# EAGLE board blinky_board (EAGLE 7.7.0)
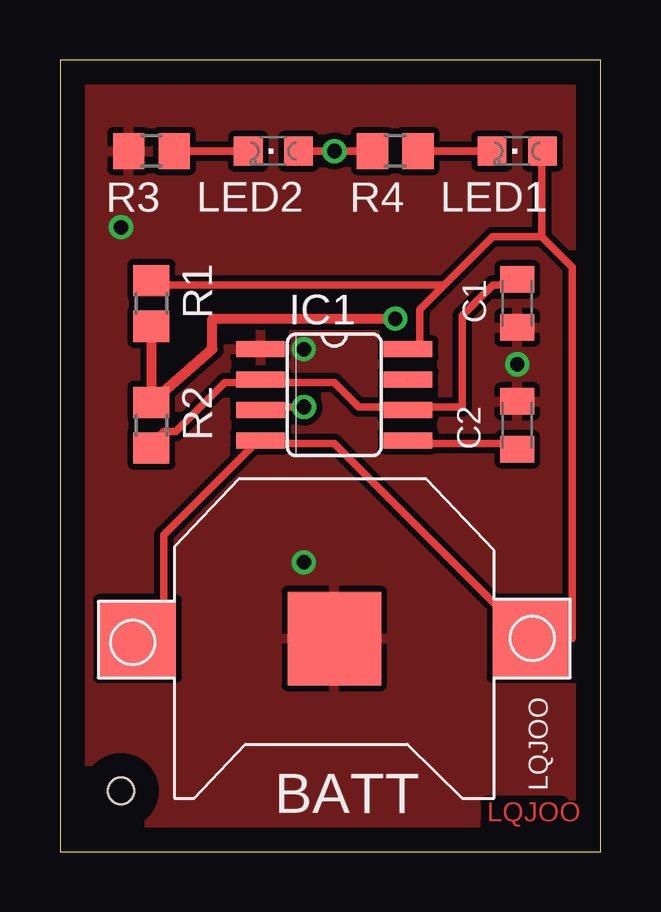
[diagram p0: board, top side]
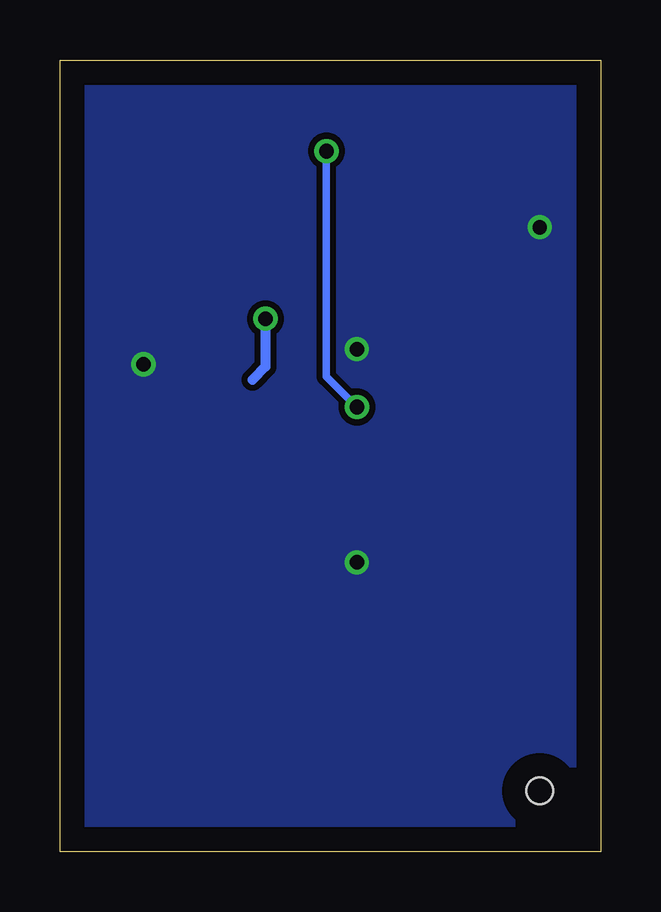
[diagram p1: board, bottom side, seen from below]

Size 22.53 x 33.01 mm. Coordinates in mm from the lower left corner, seen from the top.
Outline: 0,0 22.53,0 22.53,33.01 0,33.01 0,0
Copper layers (1*16): Top 0.035mm / dielectric 1.5mm / Bottom 0.035mm
Design rules "default": minimum track width 10mil, minimum drill 24mil, track to track 8mil, track to pad 8mil, pad to pad 8mil, via to via 8mil, smd to smd 8mil, copper to edge 40mil, drill to drill 8mil, minimum pad ring 10mil, minimum via ring 8mil, stop-mask expansion 4mil, vias tented up to drill 0mil, thermal gap 10mil
Net classes: 0 default: width 0.305 mm, drill 0.508 mm, clearance 0.254 mm
Holes 1.1 mm at 2.54,2.54

## Footprints (pad centres in the part's own frame; a part is rotated, then mirrored left to right if it is on the bottom)
CR1220-SMD = smd 3.2 x 3.2: +$1 -8.2,0; +$2 8.2,0 | smd 3.9 x 3.9: - 0,0
C0805K = smd 1.1 x 1.4: 1 -1,0; 2 1,0
SO08 = smd 0.66 x 2.032: 1 -1.905,-3.073; 2 -0.635,-3.073; 3 0.635,-3.073; 4 1.905,-3.073; 5 1.905,3.073; 6 0.635,3.073; 7 -0.635,3.073; 8 -1.905,3.073
CHIPLED_0805 = smd 1.2 x 1.2: A 0,-1.05; C 0,1.05
R0805 = smd 1.3 x 1.5: 1 -0.95,0; 2 0.95,0

## Placement (x,y rotation side)
BATT  CR1220  [CR1220-SMD]  11.43,8.89 180 top
C1  22mf  [C0805K]  19.05,22.86 270 top
C2  .01mf  [C0805K]  19.05,17.78 90 top
IC1  LM555D  [SO08]  11.43,19.05 270 top
LED1  green  [CHIPLED_0805]  19.05,29.21 90 top
LED2  green  [CHIPLED_0805]  8.89,29.21 90 top
R1  1k  [R0805]  3.81,22.86 90 top
R2  10k  [R0805]  3.81,17.78 90 top
R3  100  [R0805]  3.81,29.21 0 top
R4  100  [R0805]  13.97,29.21 0 top

## Library data of the parts
BATT = adafruit; MF: KEYSTONE; MPN: 3000; OC_FARNELL: 1650692
C1 = adafruit; MF: TE CONNECTIVITY / CGS; MPN: HBA22MFZRE; OC_FARNELL: 1502905
C2 = adafruit; MF: LITTELFUSE; MPN: 60R185XF; OC_FARNELL: 1822259
IC1 = adafruit; MF: TEXAS INSTRUMENTS; MPN: LM555CMX/NOPB.; OC_FARNELL: 1496186
LED1 LED2 = led; MF: KINGBRIGHT; MPN: KPHCM-2012CGCK; OC_FARNELL: 1686075
R1 = resistor; MF: VISHAY; MPN: CRCW06031K00FKEA; OC_FARNELL: 1469740
R2 = resistor; MF: WELWYN; MPN: MFR4-10KFI; OC_FARNELL: 1099988
R3 R4 = resistor; MF: YAGEO; MPN: RC0402JR-13100RL; OC_FARNELL: 1799317

## Nets
GND: BATT.- C1.2 C2.2 IC1.1 R3.1
N$1: C2.1 IC1.5
N$2: IC1.3 LED2.A R4.1
N$3: LED2.C R3.2
N$4: LED1.C R4.2
N$5: IC1.7 R1.1 R2.2
N$6: C1.1 IC1.2 IC1.6 R2.1
V+: BATT.+$1 BATT.+$2 IC1.4 IC1.8 LED1.A R1.2

## Tracks (layer width: path | path; a pad name or v marks a point on that pad's centre or on a via)
GND  (via drill 0.6)
  other vias: 2.54,26.04 10.16,20.95 19.05,20.32 10.16,12.06
  pour Top: -1.27,34.29 24.13,34.29 24.13,-1.27 -1.27,-1.27
  pour Bottom: -1.27,34.29 24.13,34.29 24.13,-1.27 -1.27,-1.27
N$1
  Top 0.305: C2.1 19.05,17.02 14.73,17.02 IC1.5
N$2  (via drill 0.61)
  Top 0.305: R4.1 v11.43,29.21 LED2.A | v10.16,18.54 8.38,18.54 IC1.3
  Bottom 0.305: v10.16,18.54 11.43,19.81 v11.43,29.21
N$3
  Top 0.305: R3.2 LED2.C
N$4
  Top 0.305: R4.2 LED1.C
N$5  (via drill 0.6)  (1 unrouted)
  Top 0.406: R1.1 R2.2 6.35,20.95 6.35,22.23 v13.97,22.23
  Bottom 0.406: v13.97,22.23 13.97,20.22 IC1.7
N$6
  Top 0.305: R2.1 3.81,17.02 4.32,17.53 4.83,17.53 6.86,19.56 8.13,19.56 IC1.2 8.38,19.56 11.43,19.56 12.45,18.54 14.48,18.54 IC1.6 14.73,18.54 16.76,18.54 16.76,22.35 18.03,23.62 19.05,23.62 C1.1
V+
  Top 0.305: 20.07,25.65 20.07,29.21 LED1.A | 20.07,25.65 18.03,25.65 16,23.62 | 16,23.62 14.99,22.61 14.99,21.08 14.73,21.08 IC1.8 | 16,23.62 3.81,23.62 R1.2 | BATT.+$2 4.32,8.89 4.32,13.21 8.13,17.02 IC1.4 8.38,17.02 11.43,17.02 19.56,8.89 BATT.+$1 21.34,8.89 21.34,24.38 20.07,25.65

## Text on the board
Top: LQJOO
tNames: LQJOO